# Altium PCB PCB1.PcbDoc
Units mil, origin at the board's own origin, x right, y up, seen from the top; angles counter-clockwise.
Board outline 1584.83 x 1584.83 mil, 2 copper layers (Top Layer, Bottom Layer); 41 components, 38 nets, 151 pads, 61 vias.
Unrouted connection lines stored in the file: 30.
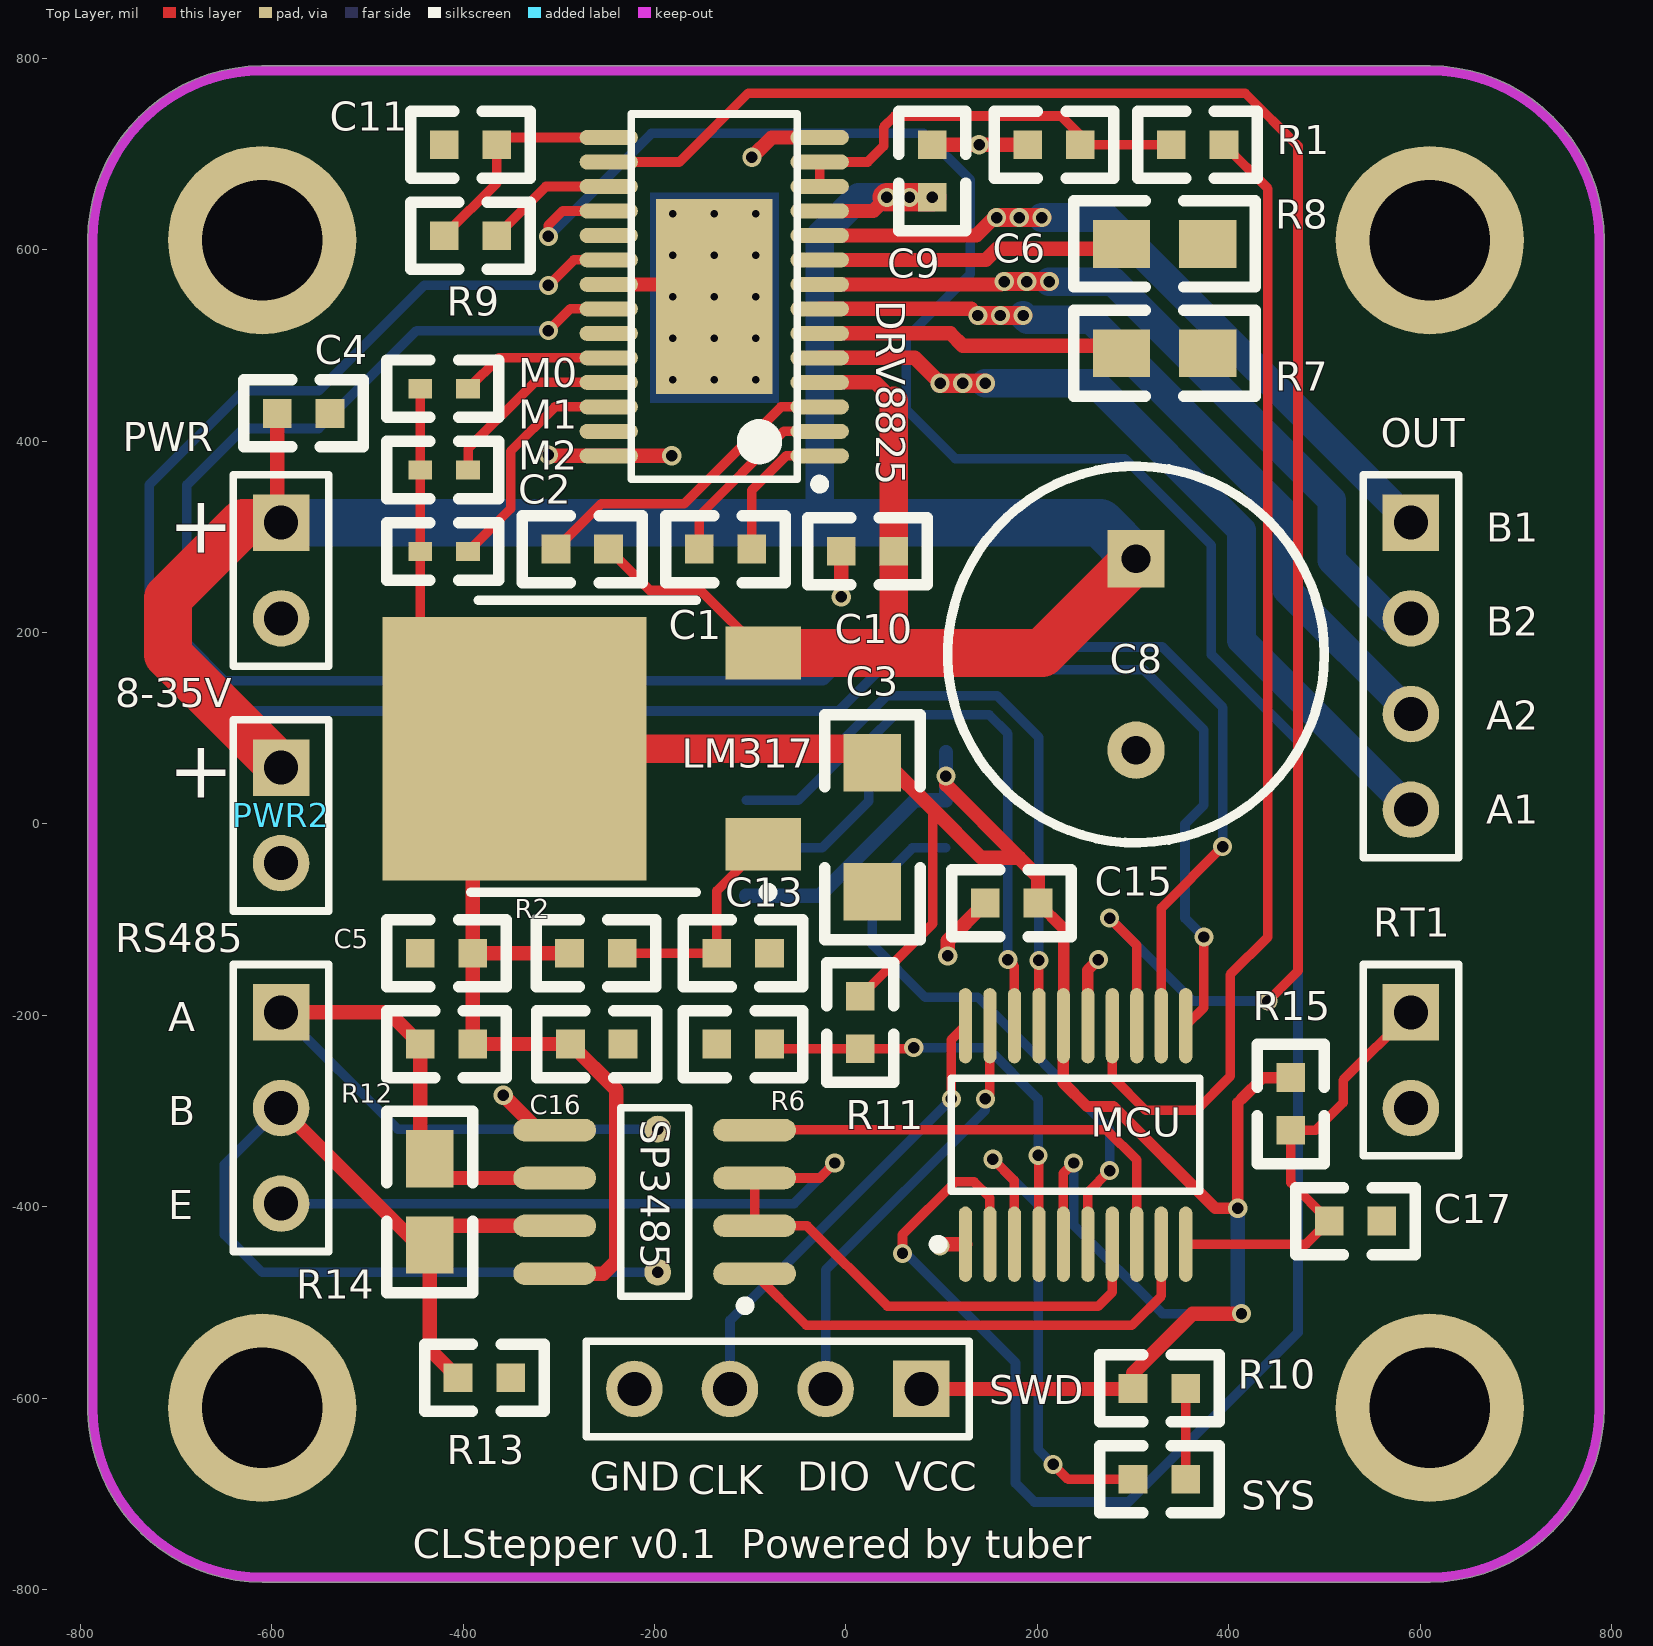
[diagram p0: Top Layer view]
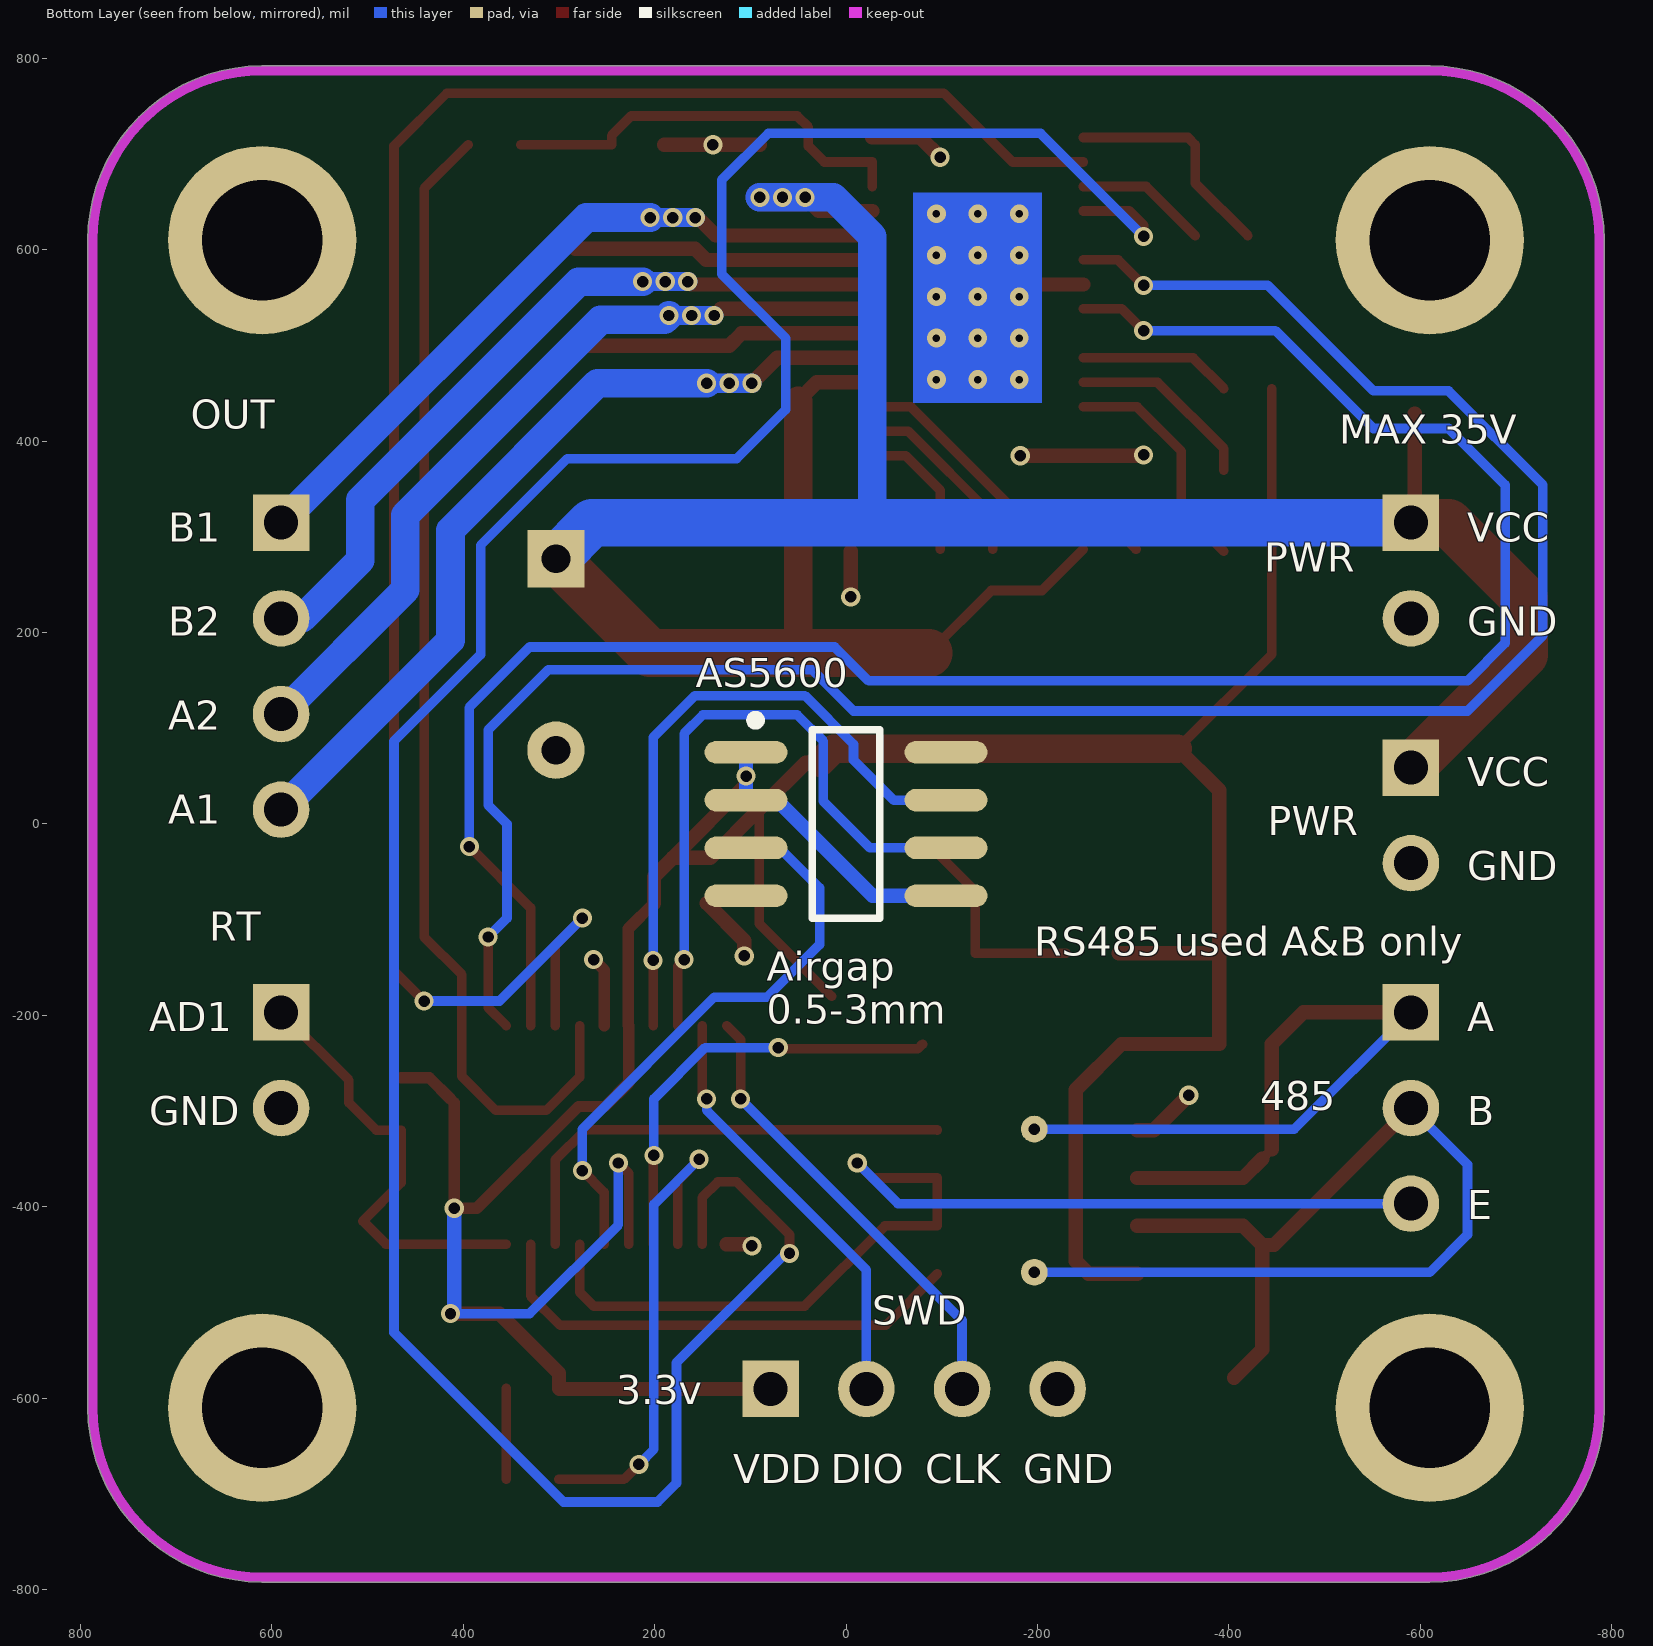
[diagram p1: Bottom Layer view, seen from below]

## Layer stack, top to bottom
Top Solder: solder mask 0.4, Solder Resist, Dk 3.5
Top Layer: signal copper 1.4
Dielectric 1: dielectric 12.6, FR-4, Dk 4.8
Bottom Layer: signal copper 1.4
Bottom Solder: solder mask 0.4, Solder Resist, Dk 3.5

## Board outline
-792.36,-614.96 ccw(c-610.24,-610.24) -610.31,-792.42 ccw(c-610.24,-610.24) -610.24,-792.42 cw(c-610.24,-787.4) -610.31,-792.42 -610.24,-792.42 610.24,-792.42 ccw(c610.24,-787.4) 610.31,-792.42 ccw(c610.24,-610.24) 792.42,-610.31 ccw(c787.4,-610.24) 792.42,-610.24 792.42,610.24 ccw(c787.4,610.24) 792.42,610.31 cw(c610.24,610.24) 792.42,610.24 792.42,610.31 ccw(c610.24,610.24) 610.31,792.42 ccw(c610.24,787.4) 610.24,792.42 -610.24,792.42 ccw(c-610.24,787.4) -610.31,792.42 cw(c-610.24,610.24) -610.24,792.42 -610.31,792.42 ccw(c-610.24,610.24) -792.42,610.31 ccw(c-610.24,610.24) -792.42,610.24 cw(c-787.4,610.24) -792.42,610.31 -792.42,610.24 -792.42,-614.17 ccw(c-787.4,-614.17)

## Design rules (kind name [scope] priority, off if disabled: settings)
Clearance [All] p1: gap=10 ignorepadtopadclearanceinfootprint=TRUE except(0: Arc-Hole Track-Hole SMDPad-Hole THPad-Hole Via-Hole Fill-Hole Poly-Hole Region-Hole Text-Hole)
PlaneConnect [All] p1: planeconnectstyle=Relief reliefexpansion=20 reliefentries=4 reliefconductorwidth=20 reliefairgap=10
PolygonConnect [All] p1: connectstyle=Relief reliefconductorwidth=10 reliefentries=4 polygonreliefangle="90 Angle" airgapwidth=10
RoutingVias [All] p1: holewidth=28 width=50 viastyle="Through Hole" minholewidth=12 minwidth=20 maxholewidth=100 maxwidth=100
SolderMaskExpansion [All] p1: expansion=4
Width [All] p1: maxlimit=100 minlimit=10 preferedwidth=10 minimp=50.000000 maximp=50.000000 favimp=50.000000
29 further rules are at their usual default settings.

## Components (designator, comment, footprint, x,y, rotation, side; value= is the part's Value field where it differs from the comment)
AS5600 "AS5600" SOIC-8 0,0 r180 bottom
C1 "Cap" 0603 -98.43,287.4 r180 top value=103
C2 "Cap" 0603 -248.15,287.4 r180 top value=104
C3 "Cap Pol1" 1206 27.56,64.13 r270 top value=100uf
C4 "Cap" 0603 -539.37,429.13 r180 top value=104
C5 "Cap" 0603 -445,-135 r0 top value=104
C6 "Cap" 0603 190,710 r0 top value=104
C8 "Cap Pol1" CAP2 303.15,177.17 r270 top value=100uf
C9 "Cap" 0603 90,710 r270 top value=104
C10 "Cap" 0603 -5,285 r0 top value=104
C11 "Cap" 0603 -420,710 r0 top value=104
C13 "Cap" 0603 -135,-230 r0 top value=104
C15 "Cap" 0603 200.67,-82.68 r180 top value=104
C16 "Cap" 0603 -233,-230 r180 top value=104
C17 "Cap" 0603 560,-415 r180 top value=104
DRV8825 "DRV8825" HTSSOP28 -137.8,551.18 r180 top
LM317 "LM317" TO252-3 -216.54,78.74 r90 top
M0 "Res1" 0402 -445,455 r0 top value=0R
M1 "Res1" 0402 -445,370 r0 top value=0R
M2 "Res1" 0402 -445,285 r0 top value=0R
MCU "STM32F030F4P6" TSSOP-20 240,-325 r90 top
OUT "Header 4" HDR1X4 590.55,314.96 r270 top
PWR "Header 2" HDR1X2 -590.55,314.96 r270 top
PWR2 "Header 2" HDR1X2 -590.55,59.06 r270 top
R1 "Res1" 0603 395,710 r180 top value=3.3K
R2 "Res1" 0603 -288.94,-135 r0 top value=10K
R6 "Res1" 0603 -80,-135 r180 top value=12K
R7 "Res1" 0805 287.95,492.13 r0 top value=R100
R8 "Res1" 0805 287.95,606.3 r0 top value=R100
R9 "Res1" 0603 -365,615 r180 top value=10K
R10 "Res1" 0603 300,-590 r0 top value=470
R11 "Res1" 0603 15,-180 r270 top value=1K
R12 "Res1" 0603 -390,-230 r180 top value=20K
R13 "Res1" 0603 -350.51,-578.74 r180 top value=20K
R14 "Res1" 0805 -435,-350 r270 top value=120
R15 "Res1" 0603 465,-265 r270 top value=10K
RS485 "Header 3" HDR1X3 -590.55,-196.85 r270 top
RT1 "Res Thermal" HDR1X2 590.55,-196.85 r270 top
SP3485 "SP3485" SOIC-8 -200,-395 r180 top
SWD "Header 4" HDR1X4 78.74,-590.55 r180 top
SYS "LED0" 0603 300,-685 r0 top

## Footprints (in the part's own frame and the unit in brackets; to place one, negate y for a bottom-side part, rotate by r counter-clockwise, add the part's x,y. Pads: shape width x height; smd on the part's side, far side on the other; paste and mask are expansions set on the pad)
0402 [mil]
  rect 25x20 smd: 1(0,0) 2(50,0)
  silkscreen extent -35,-30 82,30
0603 [mil]
  rect 30x30 smd: 1(0,0) 2(55,0)
  silkscreen extent -35,-35 90,35
0805 [mil]
  rect 60x50 smd: 1(0,0) 2(90,0)
  silkscreen extent -50,-45 140,45
1206 [mil]
  rect 60x60 smd: 1(0,0) 2(135,0)
  silkscreen extent -50,-50 185,50
CAP2 [mil]
  rect 60x60 hole 30: 1(-100,0)
  round 60 hole 30: 2(100,0)
  silkscreen extent -197,-197 197,197
HDR1X2 [mm] "Connector; Header; 2 Position"
  rect 1.5x1.5 hole 0.9: 1(0,0)
  round 1.5 hole 0.9: 2(2.54,0)
  silkscreen extent -1.27,-1.27 3.81,1.27
HDR1X3 [mm] "Connector; Header; 3 Position"
  rect 1.5x1.5 hole 0.9: 1(0,0)
  round 1.5 hole 0.9: 2(2.54,0) 3(5.08,0)
  silkscreen extent -1.27,-1.27 6.35,1.27
HDR1X4 [mm] "Connector; Header; 4 Position"
  rect 1.5x1.5 hole 0.9: 1(0,0)
  round 1.5 hole 0.9: 2(2.54,0) 3(5.08,0) 4(7.62,0)
  silkscreen extent -1.27,-1.27 8.89,1.27
HTSSOP28 [mm] "TSOP, 28-Leads, Body 9.70x4.40mm, Pitch 0.65mm, Thermal Pad 5.18x3.10mm, IPC Medium Density"
  oval 1.55x0.4 smd: 1(-2.8,4.225) 2(-2.8,3.575) 3(-2.8,2.925) 4(-2.8,2.275) 5(-2.8,1.625) 6(-2.8,0.975) 7(-2.8,0.325) 8(-2.8,-0.325) 9(-2.8,-0.975) 10(-2.8,-1.625) 11(-2.8,-2.275) 12(-2.8,-2.925) 13(-2.8,-3.575) 14(-2.8,-4.225) 15(2.8,-4.225) 16(2.8,-3.575) 17(2.8,-2.925) 18(2.8,-2.275) 19(2.8,-1.625) 20(2.8,-0.975) 21(2.8,-0.325) 22(2.8,0.325) 23(2.8,0.975) 24(2.8,1.625) 25(2.8,2.275) 26(2.8,2.925) 27(2.8,3.575) 28(2.8,4.225)
  rect 3.1x5.18 smd: 29(0,0)
  silkscreen extent -2.93,-4.85 2.2,5.1, body extent -2.15,-4.8 2.15,4.8, height 1.2
SOIC-8 [mm]
  oval 2.2x0.6 smd: 1(-2.654,1.905) 2(-2.654,0.635) 3(-2.654,-0.635) 4(-2.654,-1.905) 5(2.654,-1.905) 6(2.654,-0.635) 7(2.654,0.635) 8(2.654,1.905)
  silkscreen extent -2.53,-2.5 0.9,2.88, body extent -3,-2.45 3,2.45, height 1.7
TO252-3 [mm] "D2-PAK"
  rect 1.4x2 smd: 1(-2.54,-3.302) 3(2.54,-3.302)
  rect 7x7 smd: 2(0,3.302)
  silkscreen extent -3.93,-3.55 3.94,4.47, body extent -3.27,-3.81 3.27,6.13, height 2.39
TSSOP-20 [mm]
  oval 2x0.35 smd: 1(-2.9,2.925) 2(-2.9,2.275) 3(-2.9,1.625) 4(-2.9,0.975) 5(-2.9,0.325) 6(-2.9,-0.325) 7(-2.9,-0.975) 8(-2.9,-1.625) 9(-2.9,-2.275) 10(-2.9,-2.925) 11(2.9,-2.925) 12(2.9,-2.275) 13(2.9,-1.625) 14(2.9,-0.975) 15(2.9,-0.325) 16(2.9,0.325) 17(2.9,0.975) 18(2.9,1.625) 19(2.9,2.275) 20(2.9,2.925)
  silkscreen extent -3.02,-3.3 1.5,3.77

## Part data
C1 C2 C4 C5 C6 C9 C10 C11 C13 C15 C16 C17: "Capacitor", LatestRevisionDate=17-Jul-2002, LatestRevisionNote="Re-released for DXP Platform.", PackageDescription="Radial Cap, Thru-Hole; 2 Leads; 0.3 in Pin Spacing", PackageReference=RAD-0.3, Published=8-Jun-2000, Publisher="Altium Limited"
C3 C8: "Polarized Capacitor (Radial)", LatestRevisionDate=17-Jul-2002, LatestRevisionNote="Re-released for DXP Platform.", PackageDescription="Polarized Capacitor (Radial); 2 Leads", PackageReference=RB7.6-15, Published=8-Jun-2000, Publisher="Altium Limited"
M0 M1 M2 R1 R2 R6 R7 R8 R9 R10 R11 R12 R13 R14 R15: "Resistor", LatestRevisionDate=17-Jul-2002, LatestRevisionNote="Re-released for DXP Platform.", PackageDescription="Axial Device, Thru-Hole; 2 Leads; 0.3 in Pin Spacing", PackageReference=AXIAL-0.3, Published=8-Jun-2000, Publisher="Altium Limited"
OUT SWD: "Header, 4-Pin", LatestRevisionDate=17-Jul-2002, LatestRevisionNote="Re-released for DXP Platform.", Publisher="Altium Limited"
PWR PWR2: "Header, 2-Pin", LatestRevisionDate=17-Jul-2002, LatestRevisionNote="Re-released for DXP Platform.", Publisher="Altium Limited"
RS485: "Header, 3-Pin", LatestRevisionDate=17-Jul-2002, LatestRevisionNote="Re-released for DXP Platform.", Publisher="Altium Limited"
RT1: "Thermistor", Code_IPC=RESC2012, LatestRevisionDate=29-May-2009, LatestRevisionNote="IPC-7351 Footprint Added.", PackageDescription="Chip Resistor 0805 Case Size", PackageReference=6-0805, PackageVersion=Mar-2003, Published=24-Mar-1999, Publisher="Altium Limited"
SYS: "Typical INFRARED GaAs LED", LatestRevisionDate=08-Jul-2005, LatestRevisionNote="Mech Layer 1 removed.", PackageDescription="LED; 2 Leads", PackageReference=LED-0, Published=8-Jun-2000, Publisher="Altium Limited"

## Free pads (board coordinates)
  round 196.85 hole 125.98: 1(-610.24,610.24) 2(610.24,610.24) 3(-610.24,-610.24) 4(610.24,-610.24)
  round 28 hole 12: 5(-196.85,-318.9) 6(-196.85,-468.5)

## Via types
v1: diameter 20, hole 12, Top Layer to Bottom Layer, 46 vias
v2: diameter 19.68, hole 7.87, Top Layer to Bottom Layer, 15 vias

## Nets (pads, with @x,y where several pads share a name; then routed paths per layer and width w, separated by ;. In a path a pad name is that pad's centre, name@x,y a point inside that pad or via, vN(x,y) a via of type N, cw(c..) or ccw(c..) an arc to the next point about the centre after c; other vN are vias at no path point)
A: pad.5 R12.2 R14.1 RS485.1 SP3485.6 | length 866.5
  Top Layer w10: R14.1@-445,-340 R14.1
  Top Layer w15: RS485.1@-590.55,-196.85 -478.15,-196.85 R12.2 R14.1@-445,-340 ; R14.1 -415,-370 SP3485.6
  Bottom Layer w10: RS485.1 -468.5,-318.9 pad.5
A1: DRV8825.5 OUT.4 | length 928.3
  Top Layer w15: DRV8825.5 71.85,487.2 v1(98.43,460.63)
  Top Layer w20: v1(98.43,460.63) v1(122.05,460.63) v1(145.67,460.63)
  Bottom Layer w20: v1(98.43,460.63) v1(122.05,460.63) v1(145.67,460.63)
  Bottom Layer w30: v1(145.67,460.63) 259.84,460.63 413.39,307.09 413.39,192.13 OUT.4
A2: DRV8825.7 OUT.3 | length 897.4
  Top Layer w15: DRV8825.7 130.91,538.39 v1(137.8,531.5)
  Top Layer w20: v1(137.8,531.5) v1(161.42,531.5) v1(185.04,531.5)
  Bottom Layer w20: v1(137.8,531.5) v1(161.42,531.5) v1(185.04,531.5)
  Bottom Layer w30: v1(185.04,531.5) 189.61,526.93 256.54,526.93 460.63,322.83 460.63,244.88 OUT.3 OUT.3@590.55,125.98
AD1: C17.2 MCU.10 R15.2 RT1.1 | length 461.8
  Top Layer w10: MCU.10 480.83,-439.17 C17.2 465,-375 R15.2 491.02,-320 519.68,-291.34 519.68,-267.72 RT1.1
B: pad.6 R13.2 R14.2 RS485.2 SP3485.7 | length 1130.4
  Top Layer w15: RS485.2@-590.55,-296.85 -447.4,-440 R14.2 ; R13.2 -435,-549.25 R14.2 ; SP3485.7 -415,-420 R14.2
  Bottom Layer w10: RS485.2 -649.61,-355.91 -649.61,-429.13 -610.24,-468.5 pad.6
B1: DRV8825.10 OUT.1 | length 805.2
  Top Layer w15: DRV8825.10 136.2,615.16 154.9,633.86 v1(157.48,633.86)
  Top Layer w20: v1(157.48,633.86) v1(181.1,633.86) v1(204.72,633.86)
  Bottom Layer w20: v1(157.48,633.86) v1(181.1,633.86) v1(204.72,633.86)
  Bottom Layer w30: v1(204.72,633.86) 271.65,633.86 OUT.1
B2: DRV8825.8 OUT.2 | length 849.3
  Top Layer w15: DRV8825.8 162.4,563.98 v1(165.35,566.93)
  Top Layer w20: v1(165.35,566.93) v1(188.98,566.93) v1(212.6,566.93)
  Bottom Layer w20: v1(165.35,566.93) v1(188.98,566.93) v1(212.6,566.93)
  Bottom Layer w30: v1(212.6,566.93) 279.53,566.93 507.87,338.58 507.87,275.59 568.5,214.96 OUT.2
DE: MCU.7 RS485.3 SP3485.2 SP3485.3 | length 1201.4
  Top Layer w10: v1(-11.81,-354.33) -27.48,-370 SP3485.3 SP3485.2 -40.63,-420 43.31,-503.94 263.78,-503.94 278.39,-489.33 MCU.7
  Bottom Layer w10: RS485.3 -54.33,-396.85 v1(-11.81,-354.33)
DIR: DRV8825.20 MCU.11 | length 2247.6
  Top Layer w10: v1(-311.02,562.99) -284.45,589.57 DRV8825.20 ; MCU.11 374.02,-191.97 v1(374.02,-118.11)
  Bottom Layer w10: v1(-311.02,562.99) -440.94,562.99 -551.18,452.76 -629.92,452.76 -728.35,354.33 -728.35,196.85 -649.61,118.11 -7.87,118.11 35.43,161.42 311.02,161.42 374.02,98.43 374.02,19.68 354.33,0 354.33,-98.43 v1(374.02,-118.11)
EN: DRV8825.16 MCU.13 | length 2005.2
  Top Layer w10: DRV8825.16 -174.21,691.93 -102.36,763.78 417.32,763.78 472.44,708.66 472.44,-153.54 v1(440.94,-185.04) ; v1(275.59,-98.43) 303.98,-126.81 MCU.13
  Bottom Layer w10: v1(275.59,-98.43) 362.2,-185.04 v1(440.94,-185.04)
GND: AS5600.4 AS5600.8 C3.2 C4.1 C5.1 C6.1 C8.2 C9.1 C10.1 C11.1 C13.1 C15.2 C16.1 C17.1 DRV8825.14 DRV8825.21 DRV8825.28 DRV8825.29 MCU.1 MCU.15 pad.1 pad.2 pad.3 pad.4 PWR2.2 PWR.2 R6.1 R7.2 R8.2 R13.1 RT1.2 SP3485.5 SWD.4 | length 669.9
  Top Layer w12: MCU.15 252.8,-152.72 v1(263.78,-141.73)
  Top Layer w15: v1(-358.27,-283.46) -321.73,-320 SP3485.5 ; v1(-311.02,385.83) -310.04,384.84 DRV8825.28 v1(-182.09,384.84) ; DRV8825.21 -193.9,563.98 v2(-181.1,551.18) ; v1(-98.43,696.85) -77.76,717.52 DRV8825.14 ; v1(-5,237.28) C10.1 ; C9.1 v1(139.13,710) C6.1 ; v1(98.43,-440.94) 100.2,-439.17 MCU.1 ; v1(106.3,-137.8) 106.3,-122.05 C15.2
  other v2: -181.1,464.57 -137.79,464.57 -94.49,464.57 -181.1,507.87 -137.79,507.87 -94.49,507.87 -137.79,551.18 -94.49,551.18 -181.1,594.49 -137.79,594.49 -94.49,594.49 -181.1,637.8 -137.79,637.8 -94.49,637.8
MODE0: DRV8825.24 M0.2 | length 160.3
  Top Layer w10: M0.2 -362.8,487.2 DRV8825.24
MODE1: DRV8825.25 M1.2 | length 198
  Top Layer w10: M1.2 -395,392.4 -325.79,461.61 DRV8825.25
MODE2: DRV8825.26 M2.2 | length 244.8
  Top Layer w10: M2.2 -350.39,329.61 -350.39,389.76 -304.13,436.02 DRV8825.26
NetC1_1: C1.1 DRV8825.1 | length 147.3
  Top Layer w10: C1.1 -98.43,348.94 -62.53,384.84 DRV8825.1
NetC1_2: C1.2 DRV8825.2 | length 197.2
  Top Layer w10: C1.2 -153.43,322.23 -65.22,410.43 DRV8825.2
NetC2_2: C2.2 DRV8825.3 | length 337.2
  Top Layer w10: C2.2 -255.91,334.65 -169.29,334.65 -67.91,436.02 DRV8825.3
NetC11_2: C11.2 DRV8825.15 R9.2 | length 237.9
  Top Layer w10: R9.2 -365,670 C11.2 -357.48,717.52 DRV8825.15
NetDRV8825_6: DRV8825.6 R7.1 | length 324.1
  Top Layer w15: DRV8825.6 109.25,512.8 122.05,500 280.08,500 R7.1
NetDRV8825_9: DRV8825.9 R8.1 | length 322.4
  Top Layer w15: DRV8825.9 145.97,589.57 157.76,601.36 283.01,601.36 R8.1
NetDRV8825_17: DRV8825.17 R9.1 | length 138.2
  Top Layer w10: R9.1 -313.66,666.34 DRV8825.17
NetLM317_1: LM317.1 R2.2 R6.2 | length 228.8
  Top Layer w10: R2.2@-230,-135 R6.2 -135,-69.72 LM317.1
NetR10_2: R10.2 SYS.2 | length 95
  Top Layer w10: SYS.2 R10.2
NRST: C13.2 MCU.4 R11.2 | length 457.7
  Top Layer w10: C13.2 -75,-235 R11.2 69.65,-235 v1(70.87,-233.78) ; v1(200.79,-346.46) 201.61,-347.28 MCU.4
  Bottom Layer w10: v1(70.87,-233.78) 147.17,-233.78 200.79,-287.4 v1(200.79,-346.46)
OUT: AS5600.3 MCU.6 | length 611
  Top Layer w10: MCU.6 252.8,-385 v1(275.59,-362.2)
  Bottom Layer w10: AS5600.3 69.49,-25 27.56,-66.93 27.56,-125.98 82.68,-181.1 137.8,-181.1 275.59,-318.9 v1(275.59,-362.2)
PF0: DRV8825.18 MCU.2 | length 2950
  Top Layer w10: v1(-311.02,614.17) -311.02,625.98 -296.26,640.75 DRV8825.18 ; v1(59.06,-448.82) 59.06,-429.13 114.17,-374.02 133.86,-374.02 150.43,-390.59 MCU.2
  Bottom Layer w10: v1(-311.02,614.17) -203.35,721.85 81.3,721.85 129.92,673.23 129.92,574.8 62.99,507.87 62.99,433.07 114.17,381.89 291.34,381.89 381.89,291.34 381.89,177.17 472.44,86.61 472.44,-531.5 295.28,-708.66 196.85,-708.66 177.17,-688.98 177.17,-562.99 62.99,-448.82 v1(59.06,-448.82)
PF1: MCU.3 SYS.1 | length 533.1
  Top Layer w10: v1(153.54,-350.39) 175.79,-372.64 175.79,-438.94 MCU.3 ; v1(216.54,-669.29) 232.24,-685 SYS.1
  Bottom Layer w10: v1(153.54,-350.39) 200.79,-397.64 200.79,-653.54 v1(216.54,-669.29)
PWM: MCU.14 R1.1 | length 1215
  Top Layer w10: MCU.14 278.39,-264.44 313.16,-299.21 366.14,-299.21 401.57,-263.78 401.57,-157.48 440.94,-118.11 440.94,664.06 R1.1
REF: C6.2 DRV8825.12 DRV8825.13 R1.2 | length 442.6
  Top Layer w10: DRV8825.12 DRV8825.13 22.64,691.93 39.37,708.66 39.37,728.35 51.02,740 224.57,740 245,719.57 C6.2 R1.2
RX: MCU.9 SP3485.1 | length 514.2
  Top Layer w10: SP3485.1 -41.57,-523.94 298.9,-523.94 329.57,-493.27 MCU.9
SCL: AS5600.7 MCU.17 | length 680.4
  Top Layer w10: MCU.17 v1(201.61,-142.56)
  Bottom Layer w10: AS5600.7 -49.8,25 -7.87,66.93 -7.87,83.4 42.9,134.17 157.89,134.17 201.61,90.45 v1(201.61,-142.56)
SDA: AS5600.6 MCU.18 | length 684.6
  Top Layer w10: v1(169.29,-141.73) 176.02,-148.47 MCU.18
  Bottom Layer w10: AS5600.6 -25,-25 23.62,23.62 23.62,86.61 51.18,114.17 149.61,114.17 169.29,94.49 v1(169.29,-141.73)
STEP: DRV8825.22 MCU.12 | length 2182
  Top Layer w10: v1(-311.02,515.75) -288.39,538.39 DRV8825.22 ; MCU.12 329.57,-87.75 v1(393.7,-23.62)
  Bottom Layer w10: v1(-311.02,515.75) -448.82,515.75 -551.18,413.39 -629.92,413.39 -688.98,354.33 -688.98,188.98 -649.61,149.61 -23.62,149.61 11.81,185.04 330.71,185.04 394.02,121.73 394.02,-23.31 v1(393.7,-23.62)
SWCLK: MCU.20 SWD.3 | length 481.7
  Top Layer w10: v1(110.24,-287.4) 110.24,-225.43 MCU.20
  Bottom Layer w10: SWD.3 -121.26,-518.9 v1(110.24,-287.4)
SWDIO: MCU.19 SWD.2 | length 450.8
  Top Layer w10: v1(145.67,-287.4) 150.43,-282.64 MCU.19
  Bottom Layer w10: SWD.2 -21.26,-466.14 145.67,-299.21 v1(145.67,-287.4)
TX: MCU.8 SP3485.4 | length 500.6
  Top Layer w10: SP3485.4 -95.24,-319.72 272.48,-319.72 303.98,-351.22 MCU.8
VCC: C2.1 C4.2 C8.1 C9.2 C10.2 DRV8825.4 DRV8825.11 LM317.3 PWR2.1 PWR.1 | length 2957.4
  Top Layer w10: C2.1 -204.84,244.09 -151.89,244.09 LM317.3
  Top Layer w15: C4.2 -594.37,318.78 PWR.1 ; DRV8825.4 30.51,461.61 50,442.13 ; DRV8825.11 28.5,640.75 v1(42.76,655)
  Top Layer w30: v1(42.76,655) v1(66.38,655) v1(90,655) ; 47.24,178.74 50,181.5 C10.2 50,442.13 ; C8.1@295.32,285 C8.1
  Top Layer w50: PWR2.1 -708.66,177.17 -708.66,236.22 -629.92,314.96 PWR.1 ; LM317.3 47.24,178.74 204.72,178.74 C8.1
  Bottom Layer w30: -27.56,314.96 -27.56,614.17 13.27,655 v1(42.76,655) v1(66.38,655) v1(90,655)
  Bottom Layer w50: PWR.1 -27.56,314.96 265.36,314.96 C8.1
VDDA: AS5600.1 AS5600.2 AS5600.5 C3.1 C5.2 C15.1 C16.2 LM317.2 M0.1 M1.1 M2.1 MCU.5 MCU.16 R2.1 R10.1 R11.1 R12.1 R15.1 SP3485.8 SWD.1 | length 4005.6
  Top Layer w10: M0.1 M1.1 M2.1 -445,177.2 LM317.2 ; R11.1 90.55,-104.45 90.55,15.75 ; MCU.5 227.21,-365 v1(237.88,-354.33)
  Top Layer w12: C15.1 227.61,-109.62 227.61,-210.42 MCU.16 227.21,-270.51 251.97,-295.28 279.53,-295.28 385.83,-401.57 v1(409.45,-401.57) 409.45,-291.34 ; 413.09,-287.7 435.79,-265 R15.1
  Top Layer w15: LM317.2 -390,35.28 C5.2 ; SP3485.8 -253.46,-470 -240.16,-456.69 -240.16,-277.84 C16.2 R12.1 C5.2 ; R2.1@-285,-135 R2.1 C5.2 ; C3.1 42.17,64.13 90.55,15.75 141.73,-35.43 181.1,-35.43 ; SWD.1 299.45,-590.55 R10.1 300,-574.02 362.2,-511.81 v1(413.39,-511.81) ; v1(104.49,50) 104.49,41.18 181.1,-35.43 ; C15.1 200.67,-55 181.1,-35.43
  Top Layer w30: LM317.2 12.95,78.74 C3.1
  Bottom Layer w10: v1(237.88,-354.33) 237.88,-418.98 330.71,-511.81 v1(413.39,-511.81)
  Bottom Layer w15: AS5600.5 -27.76,-75 72.24,25 AS5600.2 v1(104.49,50) AS5600.1 ; v1(409.45,-401.57) 409.45,-507.87 v1(413.39,-511.81)
pads on no net: DRV8825.19 DRV8825.23 DRV8825.27

## Keep-outs
Keep-Out Layer:
  lines w10: -787.4,-614.17 -787.4,610.24 ; -787.4,-610.24 ccw(c-610.24,-610.24) -610.24,-787.4 610.24,-787.4 ccw(c610.24,-610.24) 787.4,-610.24 787.4,610.24 ; -787.4,610.24 cw(c-610.24,610.24) -610.24,787.4 ; -787.4,610.24 -787.4,610.24 ; -610.24,787.4 -610.24,787.4 ; -610.24,787.4 610.24,787.4 ; 610.24,787.4 cw(c610.24,610.24) 787.4,610.24 ; 610.24,787.4 610.24,787.4 ; 787.4,610.24 787.4,610.24

## Other copper
Bottom Layer:
  rectangle net GND: -205,440 -70,660

## Silkscreen, mask and mechanical layers (free items; w line width, h text height)
Top Overlay:
  text "B1" at 669.29,295.28 h30
  text "+" at -708.66,283.46 h60
  text "B2" at 669.29,196.85 h30
  text "8-35V" at -763.78,122.05 h30
  text "A2" at 669.29,98.43 h30
  text "+" at -708.66,27.56 h60
  text "A1" at 669.29,0 h30
  text "A" at -708.66,-216.54 h30
  text "B" at -708.66,-314.96 h30
  text "E" at -708.66,-413.39 h30
  text "GND" at -267.72,-696.85 h30
  text "DIO" at -51.18,-696.85 h30
  text "VCC" at 51.18,-696.85 h30
  text "CLK" at -165.35,-700.79 h30
  text "CLStepper v0.1  Powered by tuber" at -452.76,-767.72 h30
Bottom Overlay:
  text "OUT" at 685.04,413.39 h30
  text "MAX 35V" at -515.75,397.64 h30
  text "VCC" at -649.61,295.28 h30
  text "B1" at 708.66,295.28 h30
  text "PWR" at -437.01,263.78 h30
  text "GND" at -649.61,196.85 h30
  text "B2" at 708.66,196.85 h30
  text "A2" at 708.66,98.43 h30
  text "VCC" at -649.61,39.37 h30
  text "A1" at 708.66,0 h30
  text "PWR" at -440.94,-11.81 h30
  text "GND" at -649.61,-59.06 h30
  text "RT" at 665.35,-122.05 h30
  text "RS485 used A&B only" at -196.85,-137.8 h30
  text "Airgap / 0.5-3mm" at 82.68,-208.66 h30
  text "A" at -649.61,-216.54 h30
  text "AD1" at 728.35,-216.54 h30
  text "485" at -433.07,-299.21 h30
  text "B" at -649.61,-314.96 h30
  text "GND" at 728.35,-314.96 h30
  text "E" at -649.61,-413.39 h30
  text "SWD" at -27.56,-523.62 h30
  text "3.3v" at 240.16,-606.3 h30
  text "GND" at -185.04,-688.98 h30
  text "CLK" at -82.68,-688.98 h30
  text "DIO" at 15.75,-688.98 h30
  text "VDD" at 118.11,-688.98 h30
Bottom Solder:
  lines w120: -137.79,507.87 -137.79,594.49